# Altium PCB Camera_Board.PcbDoc
Units mil, origin at the board's own origin, x right, y up, seen from the top; angles counter-clockwise.
Board outline 4540 x 3550 mil, 2 copper layers (Top Layer, Bottom Layer); 69 components, 72 nets, 308 pads, 47 vias.
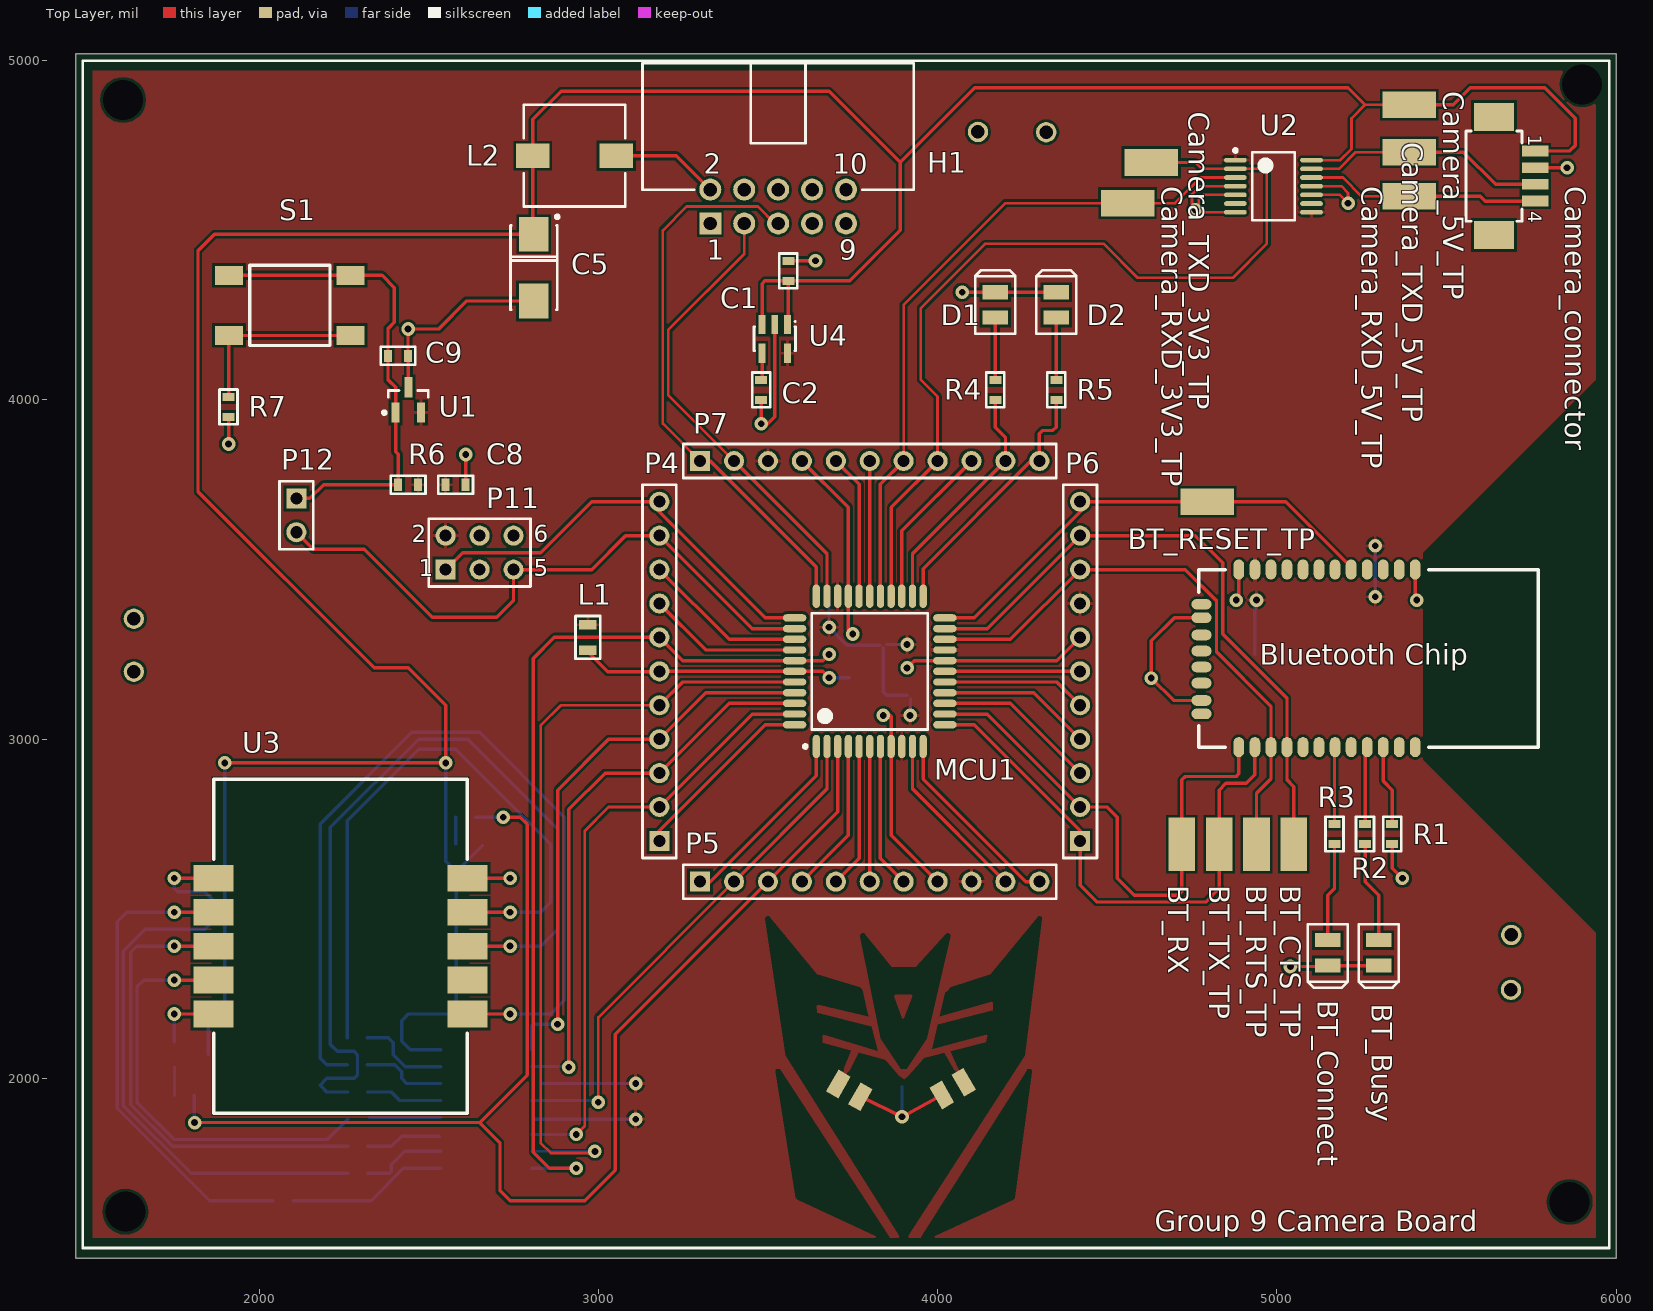
[diagram p0: Top Layer view]
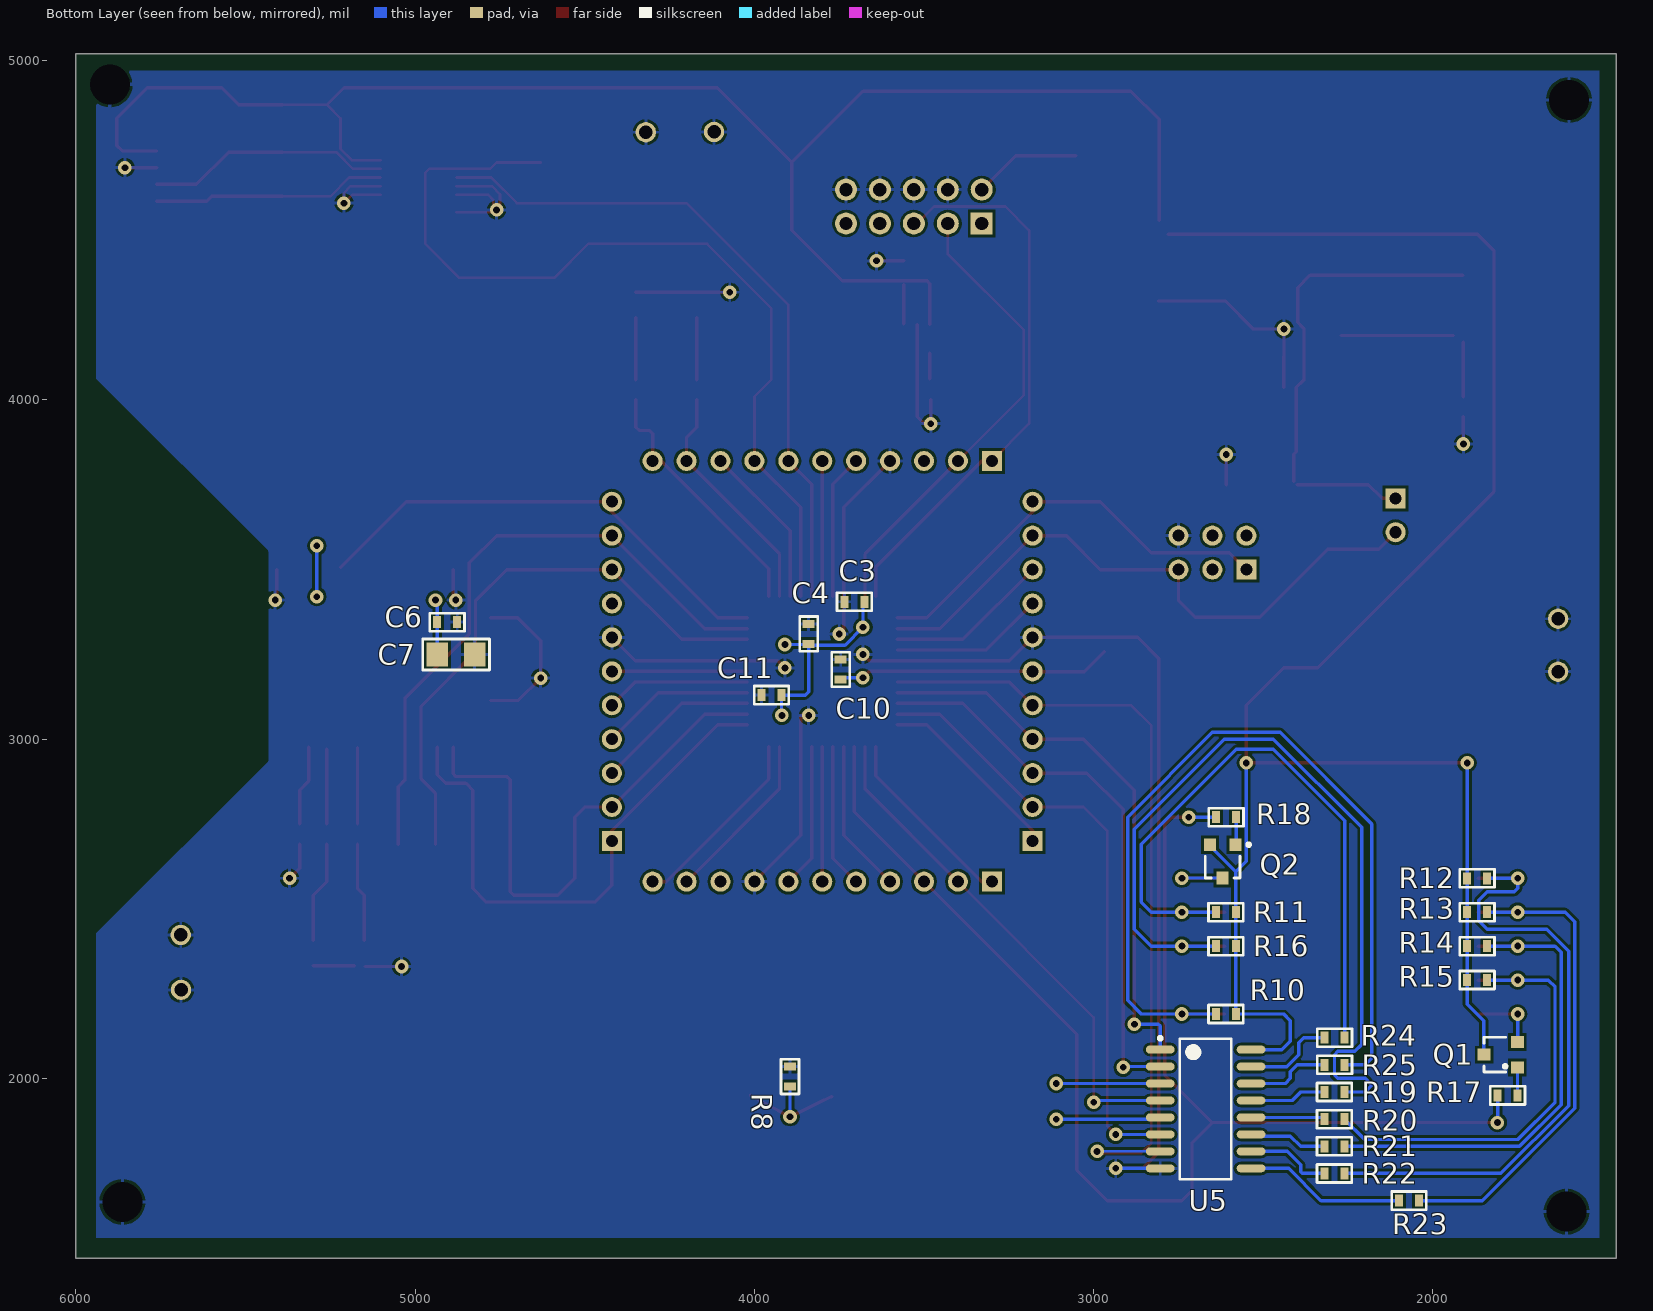
[diagram p1: Bottom Layer view, seen from below]

## Layer stack, top to bottom
Top Layer: signal copper 1.4
Dielectric: dielectric 12.6, FR-4, Dk 4.8
Bottom Layer: signal copper 1.4

## Board outline
1460,5020 1460,1470 6000,1470 6000,5020

## Design rules (kind name [scope] priority, off if disabled: settings)
Clearance Clearance_Polygon [InPolygon vs IsVia Or IsPad] p1 off: gap=23.62
Clearance [All] p2: gap=7.87
HoleSize [All] p1: absolutevalues=TRUE maxlimit=196.85 minlimit=19.68 maxpercent=80.000 minpercent=20.000
MinimumAnnularRing [All] p1: minimumring=10
MinimumSolderMaskSliver [All] p1: minsoldermaskwidth=3.94
NetAntennae [All] p1 off: netantennaetolerance=0
PasteMaskExpansion [All] p1 off: expansion=0
PolygonConnect [All] p1: connectstyle=Relief reliefconductorwidth=10 reliefentries=4 polygonreliefangle="90 Angle"
RoutingVias [All] p1: holewidth=27.56 width=47.24 viastyle="Through Hole" minholewidth=19.68 minwidth=39.37 maxholewidth=43.31 maxwidth=66.93
SMDNeckDown [All] p1: percent=60.000
SMDToCorner [All] p1: distance=393701
SilkToSilkClearance [All] p1 off: silktosilkclearance=10
SilkscreenOverComponentPads [All] p1 off: minsilkscreentomaskgap=10
SolderMaskExpansion [All] p1: expansion=5.91
Width [All] p1: maxlimit=196.85 minlimit=7.87 preferedwidth=7.87
22 further rules are at their usual default settings.

## Classes and differential pairs
component class Camera: Camera_5V_TP Camera_connector Camera_RXD_3V3_TP Camera_RXD_5V_TP Camera_TXD_3V3_TP Camera_TXD_5V_TP D1 D2 R4 R5 U2
component class Camera_MCU: C3 C4 C8 C9 C10 C11 L1 MCU1 P4 P5 P6 P7 P11 P12 R6 R7 S1 U1
component class Camera_LED_Display: Q1 Q2 R10 R11 R12 R13 R14 R15 R16 R17 R18 R19 R20 R21 R22 R23 R24 R25 U3 U5
component class Camera_Board: C1 C2 C5 D3 D4 D?? H1 L2 R8 R?? U4
component class Bluetooth: "Bluetooth Chip" BT_Busy BT_Busy_LED BT_Connect BT_Connect_LED BT_CTS_TP BT_RESET_TP BT_RTS_TP BT_RX BT_TX_TP C6 C7 R1 R2 R3

## Components (designator, comment, footprint, x,y, rotation, side; value= is the part's Value field where it differs from the comment)
"Bluetooth Chip" "RN42 Module" RN42-LAND 4770,3500 r270 top
BT_Busy "LED Red" Diode_0805 5300,2370 r270 top (schematic designator BT_Busy_LED)
BT_Connect "LED Green" DIODE_0805 5150,2370 r270 top (schematic designator BT_Connect_LED)
BT_CTS_TP "TP" TEST_POINT_4X2MM 5050,2690 r270 top
BT_RESET_TP "TP" TEST_POINT_4X2MM 4795,3700 r0 top
BT_RTS_TP "TP" TEST_POINT_4X2MM 4940,2690 r270 top
BT_RX "TP" TEST_POINT_4X2MM 4720,2690 r270 top
BT_TX_TP "TP" TEST_POINT_4X2MM 4830,2690 r270 top
C1 "1uF" 0603 3560,4410 r270 top
C2 "10nF" 0603 3480,4000 r90 top
C3 "100nF" 0603 3735,3405 r180 bottom
C4 "100nF" 0603 3840,3340 r270 bottom
C5 "CP_TANT_33uF" 6032 2810,4390 r270 top
C6 "100uF 6V3" 1206 4935,3250 r180 bottom
C7 "1uF" 0603 4935,3345 r180 bottom
C8 "100nF" 0603 2550,3750 r0 top
C9 "100nF" 0603 2380,4130 r0 top
C10 "100nF" 0603 3745.59,3235 r270 bottom
C11 "100nF" 0603 3920,3130 r0 bottom
Camera_5V_TP "TP" TEST_POINT_4X2MM 5390,4870 r180 top
Camera_connector "4 Pin Header" CONN_4X1_SMT_RA_1.25MM 5640,4660 r270 top
Camera_RXD_3V3_TP "TP" TEST_POINT_4X2MM 4560,4580 r180 top
Camera_RXD_5V_TP "TP" TEST_POINT_4X2MM 5390,4600 r0 top
Camera_TXD_3V3_TP "TP" TEST_POINT_4X2MM 4630,4700 r0 top
Camera_TXD_5V_TP "TP" TEST_POINT_4X2MM 5390,4730 r0 top
D1 "LED Green" DIODE_0805 4170,4280 r90 top
D2 "LED Green" DIODE_0805 4350,4280 r90 top
H1 "Comms" 918510x323 3530,4620 r0 top
L1 "IN_FERRITE CHIP 120 OHM 800mA 0805" 0805 2970,3300 r270 top
L2 "10uH" WE-PD 2930,4720 r0 top
MCU1 "ATXMEGA16A4-AU" TQFP80P1200X1200X120-44N 3800,3200 r90 top
P4 "Header 11" HDR1X11 3180,2700 r90 top
P5 "Header 11" HDR1X11 3300,2580 r0 top
P6 "Header 11" HDR1X11 4420,2700 r90 top
P7 "Header 11" HDR1X11 3300,3820 r0 top
P11 "Header 3X2" HDR2X3 2550,3500 r0 top
P12 "Header 2" HDR1X2 2110,3710 r270 top
Q1 "ZXM61N02F" SOT-23 1800,2070 r90 bottom
Q2 "ZXM61P02F" SOT23 2620,2640 r0 bottom
R1 "10k" 0603 5340,2750 r270 top
R2 "330R" 0603 5260,2750 r270 top
R3 "330R" 0603 5170,2750 r270 top
R4 "330R" 0603 4170,4000 r90 top
R5 "330R" 0603 4350,4000 r90 top
R6 "10k" 0603 2410,3750 r0 top
R7 "330R" 0603 1910,3950 r90 top
R8 "68R" 0603 3895,2035 r270 bottom
R10 "10k" 0603 2640,2190 r180 bottom
R11 "10k" 0603 2640,2490 r180 bottom
R12 "10k" 0603 1840,2490 r0 bottom
R13 "10k" 0603 1840,2590 r0 bottom
R14 "10k" 0603 1840,2390 r0 bottom
R15 "10k" 0603 1840,2290 r0 bottom
R16 "10k" 0603 2640,2390 r180 bottom
R17 "180R" 0603 1750,1950 r0 bottom
R18 "680R" 0603 2580,2770 r0 bottom
R19 "180R" 0603 2260.94,1960 r0 bottom
R20 "180R" 0603 2260.94,1880 r0 bottom
R21 "180R" 0603 2260.94,1800 r0 bottom
R22 "180R" 0603 2260.94,1720 r0 bottom
R23 "180R" 0603 2040.94,1640 r0 bottom
R24 "180R" 0603 2260,2120 r0 bottom
R25 "180R" 0603 2260,2040 r0 bottom
S1 "FSM2JSMA" FSM2JSMA 2090.87,4278.48 r90 top
U1 "MCP130T-300I/TT" SOT-23-TT3_N 2440,4000 r90 top
U2 "IC_TXB0104PWR" TSSOP-14_PW 4990,4630 r0 top
U3 "HDSM-541C" HDSM-541C 2240,2390 r90 top
U4 "TPS73133" DBV005 3520,4180 r180 top
U5 "SN74LS47" SOP127P780X200-16N 2670,1910 r180 bottom

## Footprints (in the part's own frame and the unit in brackets; to place one, negate y for a bottom-side part, rotate by r counter-clockwise, add the part's x,y. Pads: shape width x height; smd on the part's side, far side on the other; paste and mask are expansions set on the pad)
0603 [mm] "Non polarized 0603 footprint"
  rect 0.6x0.9 smd: 1(0,0) 2(1.5,0)
  silkscreen extent -0.55,-0.67 2.05,0.67
0805 [mm]
  rect 0.7x1.3 smd: 1(-0.95,-0.025) 2(0.95,-0.025)
  silkscreen extent -1.6,-0.95 1.6,0.9
1206 [mm] "Non-polarized 1206 footprint"
  rect 1.6x1.8 smd: 1(0,0) 2(2.8,0)
  silkscreen extent -1.09,-1.17 3.91,1.16
6032 [mm] "6032 polarized footprint"
  rect 2.6x2.2 smd: 1(-2.503,-0.003) 2(2.497,-0.003)
  silkscreen extent -3.93,-1.75 3.15,1.87
918510x323 [mm] "Connector; IDC, Low Profile Male Header, Thru-Hole; 10 Position; Right Angle; Pitch 2.54 mm; Body 20.32 x 8.9 x 9.2 mm (LxWxH)"
  rect 1.65x1.65 hole 1: 1(-5.08,-2.54)
  round 1.65 hole 1: 2(-5.08,0) 3(-2.54,-2.54) 4(-2.54,0) 5(0,-2.54) 6(0,0) 7(2.54,-2.54) 8(2.54,0) 9(5.08,-2.54) 10(5.08,0)
  silkscreen extent -10.16,0 10.16,9.45, body extent -10.26,-0.1 10.26,9.55, height 9.2
CONN_4X1_SMT_RA_1.25MM [mm] "PicoBlade 5326 Series Header"
  rect 0.8x2 smd: 1(-1.875,3.1) 2(-0.625,3.1) 3(0.625,3.1) 4(1.875,3.1)
  rect 2.1x3 smd: " "(4.425,0) ""(-4.425,0)
  silkscreen extent -3.37,-2.1 3.37,2.1
DBV005 [mm] "SOT-23/SC-74A; 5 Leads; Body 3 x 3 mm, inc. leads (LxW max)"
  rect 0.55x1.45 smd: 1(-0.95,-1.075) 3(0.95,-1.075) 4(0.95,1.075) 5(-0.95,1.075)
  rect 0.508x1.45 smd: 2(0,-1.075)
  silkscreen extent -1.58,-1.35 1.55,0.9
Diode_0805 [mm] "0805 SMD diode"
  rect 1.05x1.9 smd: 1(-0.95,0) 2(0.95,0)
  silkscreen extent -2.15,-1.5 2.6,1.5
DIODE_0805 [mm] "0805 SMD diode"
  rect 1.05x1.9 smd: 1(-0.95,0) 2(0.95,0)
  silkscreen extent -2.15,-1.5 2.6,1.5
FSM2JSMA [mm] "DPST SMD Switch Footprint"
  rect 1.4x2.1 smd paste-2.286: 1(2.248,4.55) 2(2.248,-4.55) 3(-2.248,-4.55) 4(-2.248,4.55)
  silkscreen extent -3,-3 3,3, body extent -2.97,-5.03 3.03,4.97, height 4.39
HDR1X2 [mm] "Connector; Header; 2 Position"
  rect 1.5x1.5 hole 0.9: 1(0,0)
  round 1.5 hole 0.9: 2(2.54,0)
  silkscreen extent -1.27,-1.27 3.81,1.27
HDR1X11 [mm] "Connector; Header; 11 Position"
  rect 1.5x1.5 hole 0.9: 1(0,0)
  round 1.5 hole 0.9: 2(2.54,0) 3(5.08,0) 4(7.62,0) 5(10.16,0) 6(12.7,0) 7(15.24,0) 8(17.78,0) 9(20.32,0) 10(22.86,0) 11(25.4,0)
  silkscreen extent -1.27,-1.27 26.67,1.27
HDR2X3 [mm] "Connector; Header; 3x2 Position"
  rect 1.5x1.5 hole 0.9: 1(0,0)
  round 1.5 hole 0.9: 2(0,2.54) 3(2.54,0) 4(2.54,2.54) 5(5.08,0) 6(5.08,2.54)
  silkscreen extent -1.27,-1.27 6.35,3.81
HDSM-541C [mm] "2 char 7 segment smt led display"
  rect 2x3 smd: 1(-5.08,-9.5) 2(-2.54,-9.5) 3(0,-9.5) 4(2.54,-9.5) 5(5.08,-9.5) 6(5.08,9.5) 7(2.54,9.5) 8(0,9.5) 9(-2.54,9.5) 10(-5.08,9.5)
  silkscreen extent -12.5,-9.5 12.5,9.5, body extent -12.5,-9.5 12.5,9.5, height 3.75
RN42-LAND [mm] "RN42 Footprint"
  oval 1.5x0.8 smd: 1(0,16.2) 2(0,15) 3(0,13.8) 4(0,12.6) 5(0,11.4) 6(0,10.2) 7(0,9) 8(0,7.8) 9(0,6.6) 10(0,5.4) 11(0,4.2) 12(0,3) 13(13.3,3) 14(13.3,4.2) 15(13.3,5.4) 16(13.3,6.6) 17(13.3,7.8) 18(13.3,9) 19(13.3,10.2) 20(13.3,11.4) 21(13.3,12.6) 22(13.3,13.8) 23(13.3,15) 24(13.3,16.2)
  oval 0.8x1.5 smd: 28(9.8,0.2) 29(3.6,0.2) 30(10.8,0.2) 31(8.5,0.2) 32(7.3,0.2) 33(6.1,0.2) 34(4.9,0.2) 35(2.6,0.2)
  silkscreen extent 0,0 13.3,25.4
SOP127P780X200-16N [mm] "SOP, 16-Leads, Body 10.5x5.6mm (max), Pitch 1.27mm, IPC Medium Density"
  oval 2.15x0.6 smd: 1(-3.4,4.445) 2(-3.4,3.175) 3(-3.4,1.905) 4(-3.4,0.635) 5(-3.4,-0.635) 6(-3.4,-1.905) 7(-3.4,-3.175) 8(-3.4,-4.445) 9(3.4,-4.445) 10(3.4,-3.175) 11(3.4,-1.905) 12(3.4,-0.635) 13(3.4,0.635) 14(3.4,1.905) 15(3.4,3.175) 16(3.4,4.445)
  silkscreen extent -3.53,-5.25 1.92,5.42, body extent -2.8,-5.25 2.8,5.25, height 2
SOT23 [mm] "SOT-23; 3 Leads; Body 3.0 x 2.6 mm, inc. leads (LxW max)"
  rect 0.9x0.95 smd: 1(-0.95,-1.25) 2(0.95,-1.25) 3(0,1.25)
  silkscreen extent -2.07,-1.37 1.3,1.25
SOT-23 [mm] "SOT-23; 3 Leads; Body 3.0 x 2.6 mm, inc. leads (LxW max)"
  rect 0.9x0.95 smd: 1(-0.95,-1.25) 2(0.95,-1.25) 3(0,1.25)
  silkscreen extent -1.3,-0.45 1.3,1.25
SOT-23-TT3_N [mm] "SOT23, 3-Leads, Body 2.9x1.3mm, Pitch 0.95mm, Lead Span 2.4mm, IPC Medium Density"
  rect 1.5x0.6 smd: 1(-0.95,0.95) 2(-0.95,-0.95) 3(0.95,0)
  silkscreen extent -1.07,-1.5 0.7,1.92, body extent -0.7,-1.5 0.7,1.5, height 1.12
TEST_POINT_4X2MM [mm] "Test Point Pad"
  rect 4x2 smd: 1(0,0)
TQFP80P1200X1200X120-44N [mm] "TQFP, 44-Leads, Body 12.3x12.3mm (max), Pitch 0.80mm, IPC Medium Density"
  oval 1.75x0.55 smd: 1(-5.625,4) 2(-5.625,3.2) 3(-5.625,2.4) 4(-5.625,1.6) 5(-5.625,0.8) 6(-5.625,0) 7(-5.625,-0.8) 8(-5.625,-1.6) 9(-5.625,-2.4) 10(-5.625,-3.2) 11(-5.625,-4) 23(5.625,-4) 24(5.625,-3.2) 25(5.625,-2.4) 26(5.625,-1.6) 27(5.625,-0.8) 28(5.625,0) 29(5.625,0.8) 30(5.625,1.6) 31(5.625,2.4) 32(5.625,3.2) 33(5.625,4)
  oval 0.55x1.75 smd: 12(-4,-5.625) 13(-3.2,-5.625) 14(-2.4,-5.625) 15(-1.6,-5.625) 16(-0.8,-5.625) 17(0,-5.625) 18(0.8,-5.625) 19(1.6,-5.625) 20(2.4,-5.625) 21(3.2,-5.625) 22(4,-5.625) 34(4,5.625) 35(3.2,5.625) 36(2.4,5.625) 37(1.6,5.625) 38(0.8,5.625) 39(0,5.625) 40(-0.8,5.625) 41(-1.6,5.625) 42(-2.4,5.625) 43(-3.2,5.625) 44(-4,5.625)
  silkscreen extent -5.75,-4.35 4.35,4.95, body extent -5,-5 5,5, height 1.2
TSSOP-14_PW [mm] "TSOP, 14-Leads, Body 5.1x4.5mm (max), Pitch 0.65mm, IPC Medium Density"
  oval 1.7x0.35 smd: 1(-2.85,1.95) 2(-2.85,1.3) 3(-2.85,0.65) 4(-2.85,0) 5(-2.85,-0.65) 6(-2.85,-1.3) 7(-2.85,-1.95) 8(2.85,-1.95) 9(2.85,-1.3) 10(2.85,-0.65) 11(2.85,0) 12(2.85,0.65) 13(2.85,1.3) 14(2.85,1.95)
  silkscreen extent -2.97,-2.55 1.6,2.8, body extent -2.25,-2.55 2.25,2.55, height 1.2
WE-PD [mm] "Inductor 7.6x7.6mm"
  rect 2.5x1.85 smd: 1(-3.125,0) 2(3.125,0)
  silkscreen extent -3.8,-3.8 3.8,3.8

## Part data
"Bluetooth Chip": library part RN42MOD
BT_Busy: library part "DL_LED Red 0805", "Red LED 0805"
BT_Connect D1 D2: library part "DL_LED Green 0805", "Green LED 0805"
BT_CTS_TP BT_RESET_TP BT_RTS_TP BT_RX BT_TX_TP Camera_5V_TP Camera_RXD_3V3_TP Camera_RXD_5V_TP Camera_TXD_3V3_TP Camera_TXD_5V_TP: library part TP_TESTPOINT, "Test-Point"
C1 C7: library part CP_1uF_50V_0603, "CAP CER 1.0UF 50V X7R 0603"
C2: library part "CP_10nF 0603", "CAP CER 10000PF 100V X7R 0603"
C3 C4 C8 C9 C10 C11: library part "CP_100nF 0603", "CAP CER .10UF 50V X5R 0603"
C5: library part CP_TANT_33UF_20V, "CAP TANT 33UF 20V 10% SMD"
C6: library part "CP_CER 100uF_1206_6V3", "100uF 6.3V 1206 multi-layer ceramic capacitor"
Camera_connector: library part "JP_4PIN HDR_SMT_RA_MOLEX_1", "CONN HDR VERT 4POS .100\" SNGL"
H1: library part "Header 10", "Header, IDC 10-Pin"
L1: "FERRITE CHIP 120 OHM 800mA 0805"
L2: library part "IN_10uH 2A SMT", "INDUCTOR POWER 10UH 2.0A SMD"
P4 P5 P6 P7: "Header, 11-Pin"
P11: "Header, 3-Pin, Dual row"
P12: "Header, 2-Pin"
Q1: library part TF_ZXM61N02F, "20V N-channel enhancement mode MOSFET"
Q2: library part TF_ZXM61P02F, "20V P-channel enhancement mode MOSFET"
R1 R6 R10 R11 R12 R13 R14 R15 R16: library part "RS_10k 0603", "RES 10.0K OHM 1/10W 1% 0603 SMD"
R2 R3 R4 R5 R7: library part "RS_330R 0603", "RES 330 OHM 1/10W 1% 0603 SMD"
R8: library part "RS_68R 0603", "RES 68 OHM 1/10W 1% 0603 SMD"
R17 R19 R20 R21 R22 R23 R24 R25: library part "RS_180R 0603", "RES 180OHM 1/10W 1% 0603 SMD"
R18: library part "RS_680R 0603", "RES 680 OHM 1/10W 1% 0603 SMD"
S1: library part SW_FSM2JSMA, "DPST SMD Switch"
U1: "Microcontroller Supervisory Circuit with Open Drain Output, 3-Pin SOT-23, Industrial Temperature, Tape and Reel"
U2: "IC VOLT-LEVEL TRANSLATOR 14TSSOP"
U3: "2 character 7 segment display"
U4: library part IC_TPS73133, "150mA 3.3V linear regulator with 30mV dropout"

## Free pads (board coordinates)
  round 0 hole 118.11: 0(1599,4884) 1(1605.92,1607.36) 2(5863,1636) 3(5900,4930)
  rect 41.34x74.8 smd rot 150: 1(3707.61,1983.7) 2(3772.39,1946.3)
  rect 41.34x74.8 smd rot 30: 1(4077.39,1988.7) 2(4012.61,1951.3)
  round 60 hole 39.87: 4(1631,3355) 5(1631,3199) 6(5690,2261) 7(5691,2423) 8(4119,4790) 9(4320,4789)

## Via types
v1: diameter 40, hole 20, Top Layer to Bottom Layer, 47 vias

## Nets (pads, with @x,y where several pads share a name; then routed paths per layer and width w, separated by ;. In a path a pad name is that pad's centre, name@x,y a point inside that pad or via, vN(x,y) a via of type N, cw(c..) or ccw(c..) an arc to the next point about the centre after c; other vN are vias at no path point)
AVCC: C10.2 L1.2 MCU1.39 P4.6 | length 802.1
  Top Layer w10: L1.2@2969.02,3257.4 3027.4,3199.02 P4.6@3179.02,3199.02 ; P4.6 MCU1.39 3660.94,3200 v1(3680,3180.94)
  Bottom Layer w10: v1(3680,3180.94) C10.2@3740,3180.94
GND: "Bluetooth Chip.1" "Bluetooth Chip.12" "Bluetooth Chip.28" "Bluetooth Chip.29" BT_Busy.2 BT_Connect.2 C1.1 C2.1 C3.1 C4.1 C5.2 C6.2 C7.2 C8.2 C9.2 C10.1 C11.2 Camera_connector.2 D1.2 D2.2 H1.4 H1.6 H1.8 H1.10 MCU1.8 MCU1.18 MCU1.30 MCU1.38 P4.7 P5.8 P6.7 P7.4 P11.6 pad.0 pad.1@1605.92,1607.36 pad.2@5863,1636 pad.3 pad.4 pad.5 pad.6 pad.7 pad.8 pad.9 R1.2 R7.1 R8.1 U1.3 U2.4 U2.5 U2.7 U2.10 U2.11 U4.2 U5.8 | length 7664.2
  Top Layer w8: v1@4750,4570 4750,4606.14 4773.86,4630 U2.4 ; v1@4766.77,4553.23 U2.7 ; v1@4770,4570 4770,4590 4784.41,4604.41 U2.5 ; U2.10 5185.59,4604.41 v1(5210,4580) 5210,4610 5190,4630 U2.11
  Top Layer w10: v1(1910,3870) R7.1 ; C9.2 v1(2439.06,4209.06) 2529.06,4209.06 2611.69,4291.69 C5.2 ; U1.3 C9.2@2440,4129.06 ; C8.2 v1(2609.06,3839.06) ; v1(2935,1735) 2855,1735 2807.87,1782.13 2807.87,2080 2807.87,3237.87 2870,3300 P4.7 3248.5,3231.5 MCU1.38 3661.5,3231.5 v1(3680,3250) ; C2.1 v1(3480,3930) 3500,3930 3520,3950 U4.2 ; C1.1 v1(3640,4410) ; P7.4 3737.01,3682.99 MCU1.30 3737.01,3322.99 v1(3750,3310) ; v1@3850,3060 v1(3840,3070) 3860,3070 3862.99,3067.01 MCU1.8 3862.99,2717.01 P5.8 ; v1(3910,3210) 3931.5,3231.5 MCU1.18 4351.5,3231.5 P6.7 ; v1(4072.6,4317.4) D1.2 D2.2 ; v1@4750,4570 v1(4760,4560) ; v1@4766.77,4553.23 v1(4760,4560) ; v1@4770,4570 v1(4760,4560) ; 4777.87,3114.17 4695.83,3114.17 v1(4630,3180) 4630,3290 4698.27,3358.27 4777.87,3358.27 ; v1@4888.11,3410 4888.11,3500 ; v1(5040,2330) BT_Connect.2@5147.4,2330 ; BT_Connect.2@5180,2332.6 BT_Busy.2 ; R1.2 5340,2620 v1(5370,2590) ; 5407.8,3500 5407.8,3414.65 v1(5412.44,3410) ; Camera_connector.2 v1(5855.39,4684.61)
  Bottom Layer w10: U5.8 v1(2935,1735) ; v1@5407.8,3410 v1(5412.44,3410)
  other v1: 4880,3410
"NetBluetooth Chip_19": "Bluetooth Chip.19" R3.1 | length 224.8
  Top Layer w10: R3.1 5170,2974.8
"NetBluetooth Chip_21": "Bluetooth Chip.21" R2.1 | length 220.3
  Top Layer w10: R2.1 5260,2970.32
"NetBluetooth Chip_22": "Bluetooth Chip.22" R1.1 | length 237.4
  Top Layer w10: 5313.31,2976.38 5313.31,2876.69 5340,2850 R1.1
NetBT_Busy_LED_1: BT_Busy.1 R2.2 | length 300.1
  Top Layer w10: R2.2 5260,2580 5300,2540 BT_Busy.1
NetBT_Connect_LED_1: BT_Connect.1 R3.2 | length 291.8
  Top Layer w10: BT_Connect.1 5150,2540 5170,2560 R3.2
NetC2_2: C2.2 U4.4 | length 76
  Top Layer w10: C2.2@3482.6,4061.65 U4.4
NetCamera_connector_3: Camera_connector.3 Camera_TXD_5V_TP.1 U2.13 | length 719.3
  Top Layer w8: U2.13 5183.63,4681.18 5232.45,4730 Camera_TXD_5V_TP.1
  Top Layer w10: Camera_TXD_5V_TP.1 5550,4730 5644.61,4635.39 Camera_connector.3
NetCamera_connector_4: Camera_connector.4 Camera_RXD_5V_TP.1 U2.12 | length 688.6
  Top Layer w8: U2.12 5194.41,4655.59 5250,4600 Camera_RXD_5V_TP.1
  Top Layer w10: Camera_RXD_5V_TP.1 5600,4600 5613.82,4586.18 Camera_connector.4
NetD1_1: D1.1 R4.2 | length 183.5
  Top Layer w10: R4.2 D1.1
NetD2_1: D2.1 R5.2 | length 183.5
  Top Layer w10: R5.2 D2.1
NetD3_2: pad.2@3772.39,1946.3 pad.2@4012.61,1951.3 R8.2 | length 359.2
  Top Layer w10: pad.2@3772.39,1946.3 v1(3895,1887) pad.2@4012.61,1951.3
  Bottom Layer w10: v1(3895,1887) R8.2
NetH1_2: H1.2 L2.2 | length 318.4
  Top Layer w10: L2.2 3230,4720 H1.2
NetQ1_1: Q1.1 R17.1 | length 81.8
  Bottom Layer w10: R17.1@1750.79,1950.79 Q1.1
NetQ1_2: Q1.2 U3.10 | length 197.8
  Top Layer w10: v1(1750,2190) U3.10
  Bottom Layer w10: Q1.2@1750,2108.19 v1(1750,2190)
NetQ2_1: Q2.1 R18.1 | length 78.2
  Bottom Layer w10: Q2.1@2580,2691.81 R18.1
NetQ2_3: Q2.3 U3.5 | length 245.2
  Top Layer w10: U3.5 v1(2740,2590)
  Bottom Layer w10: Q2.3 v1@2739.21,2590.79
NetR7_2: R7.2 S1.3 S1.4 | length 490.9
  Top Layer w10: R7.2 S1.4@1910,4170 ; S1.4@1940,4190 S1.3
NetR10_1: R10.1 R25.1 U3.1 | length 2656.2
  Top Layer w10: U3.1 v1(2740,2190)
  Bottom Layer w10: R25.1 2200,2040 2180,2060 2180,2750 2450,3020 2650,3020 2900,2770 2900,2230 2860,2190 v1(2740,2190) R10.1
NetR11_1: R11.1 R24.1 U3.4 | length 1971.4
  Top Layer w10: U3.4 v1(2740,2490)
  Bottom Layer w10: R24.1 2260,2760 2470,2970 2580,2970 2860,2690 2860,2520 2830,2490 v1(2740,2490) R11.1
NetR12_1: R12.1 R23.1 U3.7 | length 1507
  Top Layer w10: v1(1750,2490) U3.7
  Bottom Layer w10: R12.1 v1(1750,2490) 1610,2490 1582.13,2462.13 1582.13,1912.04 1854.17,1640 R23.1
NetR13_1: R13.1 R22.1 U3.6 | length 1926.8
  Top Layer w10: v1(1750,2590) U3.6
  Bottom Layer w10: R13.1 v1(1750,2590) 1750,2560 1760,2550 1840,2550 1864.68,2525.32 1864.68,2464.68 1840,2440 1664.72,2440 1600,2375.28 1600,1920 1604.25,1915.75 1604.25,1915.19 1799.44,1720 R22.1
NetR14_1: R14.1 R21.1 U3.8 | length 1480.4
  Top Layer w10: v1(1750,2390) U3.8
  Bottom Layer w10: R14.1 v1(1750,2390) 1640,2390 1622.13,2372.13 1622.13,1922.6 1744.72,1800 R21.1
NetR15_1: R15.1 R20.1 U3.9 | length 1355.6
  Top Layer w10: v1(1750,2290) U3.9
  Bottom Layer w10: R15.1 v1(1750,2290) 1660,2290 1640,2270 1640,1930 1750,1820 2200.94,1820 R20.1
NetR16_1: R16.1 R19.1 U3.3 | length 2568.4
  Top Layer w10: U3.3 v1(2740,2390)
  Bottom Layer w10: R19.1 2200,1960 2180,1980 2200,2000 2280,2000 2290,2010 2290,2070 2280,2080 2230,2080 2210,2100 2210,2740 2470,3000 2614.72,3000 2880,2734.72 ; R16.1 v1(2740,2390) 2830,2390 2880,2440 2880,2730
NetR19_2: R19.2 U5.13 | length 226.5
  Bottom Layer w10: R19.2 2390,1960 2415,1935 U5.13
NetR20_2: R20.2 U5.12 | length 211.1
  Bottom Layer w10: R20.2@2325,1885 U5.12
NetR21_2: R21.2 U5.11 | length 223.6
  Bottom Layer w10: R21.2 2390,1800 2420,1830 U5.11@2531.14,1830
NetR22_2: R22.2 U5.10 | length 255.1
  Bottom Layer w10: R22.2 2384.72,1720 2390,1725.28 2390,1745.75 2429.25,1785 U5.10
NetR23_2: R23.2 U5.9 | length 475.5
  Bottom Layer w10: R23.2 2330,1640 2425,1735 U5.9
NetR24_2: R24.2 U5.15 | length 273
  Bottom Layer w10: R24.2 2380.56,2120 2395.28,2105.28 2395.28,2070 2430.28,2035 U5.15
NetR25_2: R25.2 U5.14 | length 251.6
  Bottom Layer w10: R25.2 2400,2040 2420,2020 2420,2000 2435,1985 U5.14
PA0: MCU1.40 P4.5 U5.7 | length 2392.4
  Top Layer w8: v1(2990,1785) 2985,1780 2860,1780 2830,1810 2830,3040 2890,3100 P4.5
  Top Layer w10: P4.5 3248.5,3168.5 MCU1.40
  Bottom Layer w8: U5.7 v1(2990,1785)
PA1: MCU1.41 P4.4 U5.1 | length 1669.6
  Top Layer w10: v1(2880,2160) 2880,2850 3030,3000 P4.4 3317.01,3137.01 MCU1.41
  Bottom Layer w10: U5.1 2803.86,2154.7 2809.15,2160 2870,2160 2880,2150 v1(2880,2160)
PA2: MCU1.42 P4.3 U5.2 | length 1660.4
  Top Layer w10: v1@2910,2030 v1(2912.87,2032.87) 2912.87,2792.87 3020,2900 P4.3 3385.51,3105.51 MCU1.42
  Bottom Layer w8: U5.2 v1@2905,2035
PA3: MCU1.43 P4.2 U5.6 | length 1797.5
  Top Layer w8: v1(2935,1835) 2960,1860 2960,2730 3030,2800 P4.2
  Top Layer w10: P4.2 3454.02,3074.02 MCU1.43
  Bottom Layer w8: U5.6 v1(2935,1835)
PA4: MCU1.44 P4.1 | length 558
  Top Layer w10: P4.1 3180,2730 3492.52,3042.52 MCU1.44
PA5: MCU1.1 P5.1 | length 558
  Top Layer w10: P5.1 3330,2580 3642.52,2892.52 MCU1.1
PA6: MCU1.2 P5.2 U5.4 | length 1523.9
  Top Layer w8: v1(3000,1930) 3000,2180 P5.2
  Top Layer w10: P5.2 3674.02,2854.02 MCU1.2
  Bottom Layer w8: U5.4 v1@3000,1935
PA7: MCU1.3 P5.3 R17.2 R18.2 | length 4162.2
  Top Layer w10: v1(1810,1870) 2650,1870 ; v1(2720,2770) 2770,2770 2790,2750 2790,2010 2650,1870 ; MCU1.3 3705.51,2785.51 P5.3 3050,2130 3050,1730 2960,1640 2740,1640 2710,1670 2710,1810 2650,1870
  Bottom Layer w10: R17.2 1809.06,1870.94 v1(1810,1870) ; R18.2 v1(2720,2770) v1@2730,2770
PB0: MCU1.4 P5.4 | length 455.3
  Top Layer w10: P5.4 3737.01,2717.01 MCU1.4
PB1: MCU1.5 P5.5 | length 426.9
  Top Layer w10: P5.5 3768.5,2648.5 MCU1.5
PB2: MCU1.6 P5.6 | length 398.5
  Top Layer w10: P5.6 MCU1.6
PB3: MCU1.7 P5.7 | length 426.9
  Top Layer w10: MCU1.7 3831.5,2648.5 P5.7
PC0: MCU1.10 P5.10 | length 512
  Top Layer w10: MCU1.10 3925.98,2854.02 P5.10
PC1: MCU1.11 P5.11 | length 563.9
  Top Layer w10: MCU1.11 3957.48,2882.52 4260,2580 P5.11
PC2: "Bluetooth Chip.14" BT_TX_TP.1 MCU1.12 P6.1 | length 1630.4
  Top Layer w10: MCU1.12 4107.48,3042.52 4420,2730 P6.1 4420,2570 4470,2520 4790,2520 4830,2560 BT_TX_TP.1 4830,2850 4850,2870 4910,2870 4935.35,2895.35 4935.35,2976.38
PC3: "Bluetooth Chip.13" BT_RX.1 MCU1.13 P6.2 | length 1613.2
  Top Layer w10: MCU1.13 4145.98,3074.02 P6.2 4500,2800 4530,2770 4530,2590 4580,2540 4710,2540 4720,2550 BT_RX.1 4720,2880 4730,2890 4880,2890 4888.11,2898.11 4888.11,2976.38
PC4: MCU1.14 P6.3 | length 483.7
  Top Layer w10: MCU1.14 4214.49,3105.51 P6.3
PC5: MCU1.15 P6.4 | length 455.3
  Top Layer w10: MCU1.15 4282.99,3137.01 P6.4
PC6: MCU1.16 P6.5 | length 426.9
  Top Layer w10: MCU1.16 4351.5,3168.5 P6.5
PC7: MCU1.17 P6.6 | length 398.5
  Top Layer w10: MCU1.17 P6.6
PD0: "Bluetooth Chip.15" BT_RTS_TP.1 MCU1.20 P6.9 | length 1725.9
  Top Layer w10: MCU1.20 4214.49,3294.49 P6.9 4730,3500 4822.13,3407.87 4822.13,3257.87 4982.6,3097.4 4982.6,2976.38 4982.6,2882.6 4940,2840 BT_RTS_TP.1
PD1: "Bluetooth Chip.16" BT_CTS_TP.1 MCU1.21 P6.10 | length 1882.2
  Top Layer w10: MCU1.21 4145.98,3325.98 P6.10 4760,3600 4840,3520 4840,3310 5029.84,3120.16 5029.84,2976.38 5029.84,2880.16 5050,2860 BT_CTS_TP.1
PD2: "Bluetooth Chip.5" BT_RESET_TP.1 MCU1.22 P6.11 | length 1436.7
  Top Layer w10: MCU1.22 4107.48,3357.48 4420,3670 P6.11 BT_RESET_TP.1 5025.83,3700 5218.82,3507.01
PD3: MCU1.23 P7.11 R5.1 | length 773.4
  Top Layer w10: MCU1.23 3957.48,3502.52 4274.96,3820 P7.11 4300,3900 4310,3910 4340,3910 4350,3920 R5.1
PD4: MCU1.24 P7.10 R4.1 | length 704.5
  Top Layer w10: MCU1.24 3925.98,3545.98 P7.10 4200,3890 4170,3920 R4.1
PD5: MCU1.25 P7.9 | length 483.7
  Top Layer w10: MCU1.25 3894.49,3614.49 P7.9
PD6: Camera_TXD_3V3_TP.1 MCU1.26 P7.8 U2.2 | length 2670
  Top Layer w8: P7.8 4000,4010 3950,4060 3950,4270 4140,4460 4490,4460 4590,4360 4870,4360 4970,4460 4970,4670 4958.82,4681.18 U2.2 4778.82,4681.18 4760,4700 Camera_TXD_3V3_TP.1
  Top Layer w10: MCU1.26 3862.99,3682.99 P7.8
PD7: Camera_RXD_3V3_TP.1 MCU1.27 P7.7 U2.3 | length 2020.3
  Top Layer w8: P7.7 3900,4280 4200,4580 Camera_RXD_3V3_TP.1 4700,4580 4775.59,4655.59 U2.3
  Top Layer w10: MCU1.27 3831.5,3751.5 P7.7
PDI_CLK: MCU1.35 P4.10 P11.5 P12.2 | length 1857.7
  Top Layer w10: P12.2 2160,3560 2310,3560 2510,3360 2700,3360 2750,3410 P11.5 2980,3500 3080,3600 P4.10 ; P4.10@3180,3580 P4.10 ; MCU1.35 3454.02,3325.98 P4.10
PDI_DATA: MCU1.34 P4.11 P11.1 | length 1280.8
  Top Layer w10: P11.1 2600,3550 2830,3550 2980,3700 P4.11 ; P4.11@3180,3710 P4.11 ; MCU1.34 3492.52,3357.48 3180,3670 P4.11
PE0: MCU1.28 P7.6 | length 398.5
  Top Layer w10: MCU1.28 P7.6
PE1: MCU1.29 P7.5 | length 426.9
  Top Layer w10: P7.5 3768.5,3751.5 MCU1.29
PE2: H1.3 MCU1.32 P7.2 | length 1385.3
  Top Layer w8: P7.2 3205.87,4014.13 3205.87,4205.87 3430,4430 H1.3
  Top Layer w10: P7.2 3674.02,3545.98 MCU1.32
PE3: H1.5 MCU1.33 P7.1 | length 1673.3
  Top Layer w8: P7.1 3190,3930 3190,4500 3260,4570 3470,4570 3520,4520 H1.5
  Top Layer w10: P7.1 3330,3820 3642.52,3507.48 MCU1.33
PR0: MCU1.36 P4.9 | length 483.7
  Top Layer w10: P4.9 3385.51,3294.49 MCU1.36
PR1: MCU1.37 P4.8 | length 455.3
  Top Layer w10: P4.8 3317.01,3262.99 MCU1.37
R\E\S\E\T\: C9.1 P12.1 R6.1 S1.1 S1.2 U1.1 | length 1409.2
  Top Layer w10: S1.1 S1.2 2362.38,4366.97 2398.48,4330.87 2398.48,4228.48 2380,4210 C9.1 2380,4060 2402.6,4037.4 U1.1 ; P12.1 2150,3710 2190,3750 R6.1@2400,3750 ; U1.1@2402.6,3952.6 U1.1 ; R6.1@2410,3760 2410,3840 2402.6,3847.4 U1.1
V_3.3_CAMERA: "Bluetooth Chip.11" C3.2 C4.2 C6.1 C7.1 C8.1 C11.1 L1.1 MCU1.9 MCU1.19 MCU1.31 P5.9 P6.8 P7.3 P11.2 pad.1@3707.61,1983.7 pad.1@4077.39,1988.7 R6.2 U1.2 U2.1 U2.8 U4.5 U5.3 U5.5 | length 1460.7
  Top Layer w10: v1@4935.35,3414.65 v1(4940,3410)
  Bottom Layer w10: U5.5@2808.86,1880 v1(3110,1880) ; U5.3@2830,1985 v1(3110,1985) ; C3.2@3680,3400.94 v1(3680,3330) 3732.87,3277.13 C4.2@3830,3277.13 ; C4.2@3840,3270 3840,3140 3850,3130 C11.1@3910,3130 ; C4.2@3850,3279.06 v1(3910,3279.06) v1@3908.07,3277.13 ; v1@3920,3071.02 C11.1@3920,3120 ; C6.1@4935.35,3250.35 4935.35,3410 v1(4940,3410) ; v1(5290,3420) v1(5290,3570)
  other v1: 3918.98,3070
V_5_CAMERA: C1.2 C5.1 Camera_5V_TP.1 Camera_connector.1 L2.1 Q1.3 Q2.2 R10.2 R11.2 R12.2 R13.2 R14.2 R15.2 R16.2 U2.14 U4.1 U4.3 U5.16 | length 10648.4
  Top Layer w8: U2.14 5186.77,4706.77 5220,4740 5220,4830 5260,4870 ; 5209.76,4920.24 5260,4870 ; Camera_5V_TP.1 5260,4870
  Top Layer w10: v1(1899.06,2930) v1(2550,2930) ; v1@2560,2930 v1(2550,2930) ; C5.1@2780,4488.54 1868.54,4488.54 1820,4440 1820,3730 2340,3210 2440,3210 2550,3100 v1(2550,2930) ; C5.1@2806.97,4530 L2.1 2806.97,4826.97 2890,4910 3680,4910 3889.88,4700.12 ; U4.3 3482.6,4342.6 3490.94,4350.94 C1.2 3740.94,4350.94 3889.88,4499.88 3889.88,4700.12 ; U4.1@3560,4224.92 C1.2@3560,4340 ; 5209.76,4920.24 4110,4920.24 3889.88,4700.12 ; Camera_5V_TP.1 5520,4870 5570,4920 5790,4920 5880,4830 5880,4750 5863.82,4733.82 Camera_connector.1
  Bottom Layer w10: Q1.3@1850,2070.79 1850,2170 1899.06,2219.06 R15.2 R14.2 R12.2 R13.2 v1(1899.06,2930) v1@1899.06,2939.06 ; U5.16 2445,2085 2420,2110 2420,2170 2440,2190 R10.2@2570,2190 ; v1(2550,2930) 2550,2640 2580.94,2609.06 ; R10.2@2580.94,2200 R16.2 R11.2 2580.94,2609.06 ; Q2.2@2657.4,2685.51 2580.94,2609.06
pads on no net: "Bluetooth Chip.2" "Bluetooth Chip.3" "Bluetooth Chip.4" "Bluetooth Chip.6" "Bluetooth Chip.7" "Bluetooth Chip.8" "Bluetooth Chip.9" "Bluetooth Chip.10" "Bluetooth Chip.17" "Bluetooth Chip.18" "Bluetooth Chip.20" "Bluetooth Chip.23" "Bluetooth Chip.24" "Bluetooth Chip.30" "Bluetooth Chip.31" "Bluetooth Chip.32" "Bluetooth Chip.33" "Bluetooth Chip.34" "Bluetooth Chip.35" "Camera_connector. " Camera_connector. H1.1 H1.7 H1.9 P11.3 P11.4 U2.6 U2.9 U3.2

## Polygon pours and split planes (outlines as drawn)
GND on Bottom Layer "GND_NET" (solid, pour order 1000): 5431,2940 5433.64,2933.64 5940,2427.27 5940,1530 1510,1530 1510,4970 5940,4970 5940,4062.73 5433.64,3556.36 5431,3550
V_3.3_CAMERA on Top Layer "Top Layer-No Net" (solid, pour order 1008): 3891,2027.28 3909,2027.28 3913.68,2007.81 3901,1997 3886.3,2008.33
V_3.3_CAMERA on Top Layer "Top Layer-No Net" (solid, pour order 1007): 3825.31,2080.57 3661,2130 3662,2105 3856,2053
V_3.3_CAMERA on Top Layer "Top Layer-No Net" (solid, pour order 1006): 3798.71,2182.28 3644,2218 3645,2194 3808,2153
V_3.3_CAMERA on Top Layer "Top Layer-No Net" (solid, pour order 1005): 3983.09,2086.71 4148,2130 4142,2106 3951,2059
V_3.3_CAMERA on Top Layer "Top Layer-No Net" (solid, pour order 1004): 4004,2182 4163,2227 4163,2201 3999,2158
V_3.3_CAMERA on Top Layer "Top Layer-No Net" (solid, pour order 1003): 3898,2171 3927,2246 3871,2246
V_3.3_CAMERA on Top Layer "Top Layer-No Net" (solid, pour order 1000): 3778.79,2261.95 3795.4,2187.2 3798.71,2182.28 3825.31,2080.57 3891,2002.77 3891,2027.28 3832.51,2115.01 3831.17,2118.24 3831.17,2118.26 3771.18,2418.21 3771.17,2418.24 cw(c3780,2420) 3787.03,2425.62 3864.33,2329 3935.99,2329 4023.3,2426.01 4023.31,2426.02 cw(c4030,2420) 4039,2420 4038.76,2417.95 3968.76,2117.95 3967.49,2115.01 3909,2027.28 3909,2002.49 3983.09,2086.71 4021.23,2252.02 4030.55,2258.98 4031.21,2261.95 4037.15,2268.54 4037.19,2268.55 4154.7,2307.72 4293.05,2475.72 cw(c4300,2470) 4309,2470 4308.93,2468.88 4258.93,2068.89 4258.93,2068.88 4257.55,2065.1 3910.73,1530 3951,1530 3952.39,1534.81 4262.39,2024.81 cw(c4270,2020) 4279,2020 4278.92,2018.79 4278.92,2018.77 4228.92,1648.82 4228.92,1648.79 4223.77,1641.83 4223.75,1641.82 3981.48,1530 5940,1530 5940,2430 5430,2940 5430,3550 5940,4060 5940,4970 1510,4970 1510,1530 3828.52,1530 3586.25,1641.82 3586.23,1641.83 3581.12,1648.56 3581.11,1648.59 3521.12,2018.53 3521.12,2018.56 cw(c3530,2020) 3537.54,2024.92 3537.55,2024.9 3857.52,1534.94 3857.54,1534.92 3858.98,1530.56 3859.02,1530 3889.36,1530 3552.39,2065.2 3552.38,2065.2 3551.1,2068.66 3551.1,2068.68 3491.1,2468.65 3491.1,2468.66 cw(c3500,2470) 3506.95,2475.72 3645.23,2307.81 3772.64,2268.6 3772.65,2268.6
V_3.3_CAMERA on Top Layer "Top Layer-No Net" (solid, pour order 1000): 3769.13,2080.26 3730.13,2002.26 3717.13,2008.26 3749.13,2092.26
V_3.3_CAMERA on Top Layer "Top Layer-No Net" (solid, pour order 1001): 4055.24,2015.36 4017.24,2080.36 4034.24,2086.36 4063.24,2021.36 4055.24,2015.36

## Other copper
Top Layer:
  pour cut-out: 1860,2890 2620,2890 2620,1890 1860,1890

## Silkscreen, mask and mechanical layers (free items; w line width, h text height)
Top Overlay:
  lines w8: 1480,1500 1480,5000 5980,5000 5980,1500 1480,1500
  text "Group 9 Camera Board" at 4640,1550 h60

## Text inside footprints (layer, text, board x,y; h text height)
Camera_connector: Top Overlay "4" at 5741.38,4556.65 h39.37 r270; Top Overlay "1" at 5741.38,4782.05 h39.37 r270
H1: Top Overlay "2" at 3310.32,4667.24 h59.06; Top Overlay "1" at 3320.16,4413.7 h59.06; Top Overlay "10" at 3690.63,4667.24 h59.06; Top Overlay "9" at 3710.32,4413.7 h59.06
P11: Top Overlay "6" at 2810,3580 h50; Top Overlay "5" at 2810,3480 h50; Top Overlay "2" at 2450,3580 h50; Top Overlay "1" at 2470,3480 h50